# Altium PCB PCB1.PcbDoc (part 7 of 8)
Units mil, origin at the board's own origin, x right, y up, seen from the top; angles counter-clockwise.
Board outline 6000 x 4000 mil, 2 copper layers (Top Layer, Bottom Layer); 1253 components, 565 nets, 6549 pads, 0 vias.
Unrouted connection lines stored in the file: 1925.
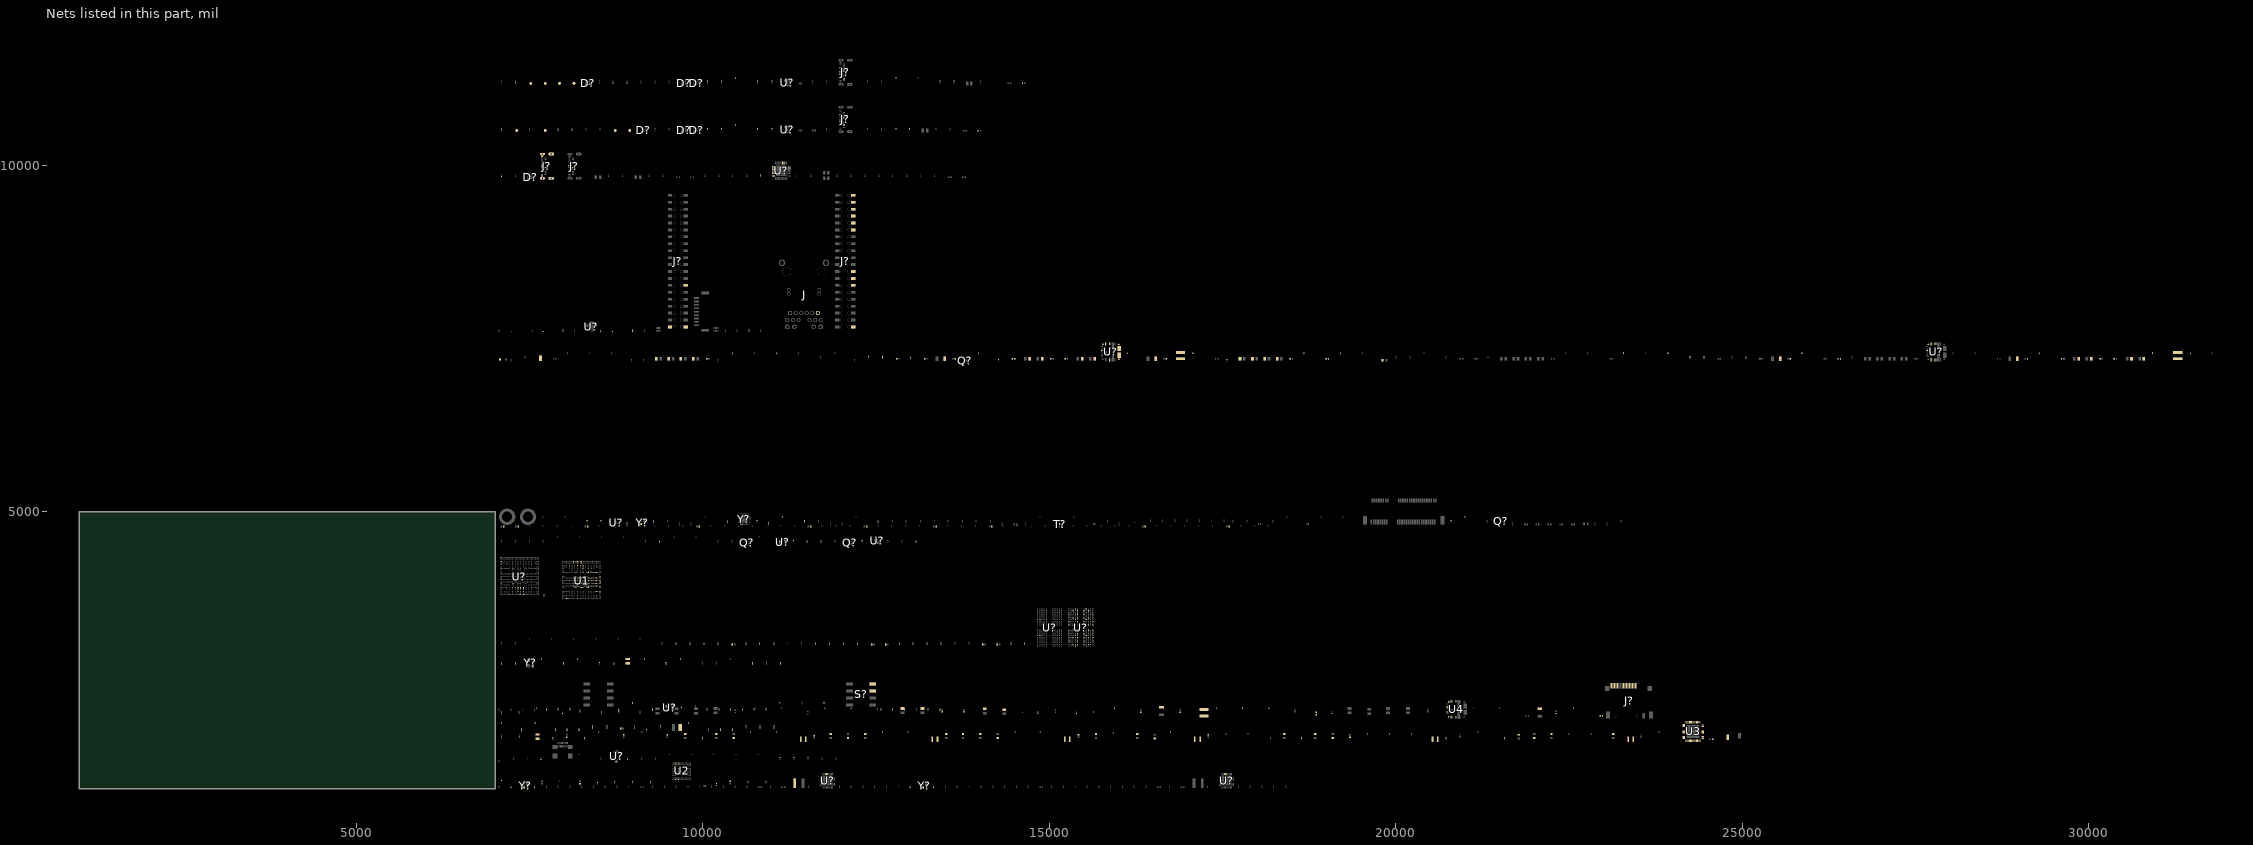
[diagram p5: the nets of this part, all layers, seen from the top]

## Nets (pads, with @x,y where several pads share a name; then routed paths per layer and width w, separated by ;. In a path a pad name is that pad's centre, name@x,y a point inside that pad or via, vN(x,y) a via of type N, cw(c..) or ccw(c..) an arc to the next point about the centre after c; other vN are vias at no path point) (continued)
mPCIe_W_DISABLE: PTP?.1@21000,4920 Q?.1@21516.14,4846.22 R?.2@20800,4871.42
NetC72_1: C72.1 PTP23.1 U3.2
NetC78_2: C78.2 PTP9.1 U3.1
NetC?_1: C?.1@8525,7598.58 L?.1@8985,7598.58 PTP?.1@8695,7600 U?.12@8449.06,7654.25 U?.14@8449.06,7685.75
NetC?_2: C?.2@10665,7621.42 J.6@11660,7865
NetCR?_2: 
NetF?_1: T?.1@7071.69,7195
NetJ?_1: J?.1@23463.58,2485.04 R?.2@10425,1861.42
NetJ?_2: J?.2@23420.28,2485.04 R?.1@10255,1838.58
NetJ?_3: J?.3@23376.97,2485.04 R?.1@10085,1838.58
NetJ?_5: J?.5@23290.35,2485.04 R?.1@8210,1838.58
NetJ?_7: J?.7@23203.74,2485.04 R?.1@8040,1838.58
NetJ?_8: J?.8@23160.43,2485.04 R?.1@7870,1838.58
NetJ?_SH1: J?.SH1@7678.56,9845.24 J?.SH2@7678.56,10124.76 J?.SH3@7811.44,9809.8 J?.SH4@7811.44,10160.2 J?.SH5@7685.45,9809.8 J?.SH6@7685.45,10160.2 L?.1@7090,9833.58
NetL1_1: L1.1 PTP3.1 U3.45 U3.46
NetL2_1: L2.1 PTP5.1 U3.36 U3.37
NetL3_1: L3.1 PTP10.1 U3.31 U3.32
NetL4_1: L4.1 PTP12.1 U3.19 U3.20
NetL5_1: L5.1 PTP14.1 U3.15
NetL6_1: L6.1 PTP16.1 U3.50 U3.51
NetL?_1: L?.1@11325.94,1075 U?.30@11896.46,1185.87
NetPTP8_1: PTP8.1 R5.1 R6.1 U3.38
NetPTP32_1: PTP32.1 R10.1 R13.1 U4.4
NetPTP36_1: PTP36.1 R14.2 R16.1 U4.8
NetPTP?_1: PTP?.1@8985,2240 R?.1@9275,2128.58 U?.5@9562.8,2170
NetQ?_3: Q?.3@13798.78,7180 R?.2@14265,7196.42
NetR3_1: R3.1 R4.1 U3.44
NetR17_2: R17.2 U4.11
NetR18_2: R18.2 U4.7
NetR?_1: R?.1@7665,1423.58 U1.AJ28
NetR?_2: R?.2@10835,9856.42 U?.25@11242.2,9959.37
NVCC_DRAM_1V1: C47.2 C48.2 C49.2 C50.2 C51.2 C52.2 C53.2 C54.2 C55.2 C92.1 C93.2 C?.1@9615,3088.58 C?.1@9815,3088.58 C?.1@10015,3088.58 C?.1@10220,3088.58 C?.1@10422.28,3080 C?.1@10620,3088.58 C?.1@10820,3088.58 C?.1@11025,3088.58 C?.1@11625,3088.58 C?.1@11830,3088.58 C?.1@12030,3088.58 C?.1@12230,3088.58 C?.1@12437.28,3080 C?.1@12637.28,3080 C?.1@12835,3088.58 C?.1@13035,3088.58 L6.2 PTP17.1 R?.1@13420,2128.58 U1.AA10 U3.52 U?.A4@15376.26,3593.7 U?.A9@15533.74,3593.7 U?.AA3@15344.76,3081.89 U?.AA5@15407.76,3081.89 U?.AA8@15502.24,3081.89 U?.AA10@15565.24,3081.89 U?.AB4@15376.26,3056.3 U?.AB9@15533.74,3056.3 U?.B3@15344.76,3568.11 U?.B5@15407.76,3568.11 U?.B8@15502.24,3568.11 U?.B10@15565.24,3568.11 U?.D1@15281.77,3516.93 U?.D5@15407.76,3516.93 U?.D8@15502.24,3516.93 U?.D12@15628.23,3516.93 U?.F3@15344.76,3465.75 U?.F5@15407.76,3465.75 U?.F8@15502.24,3465.75 U?.F10@15565.24,3465.75 U?.G2@14863.27,3440.16 U?.H1@15281.77,3414.57 U?.H5@15407.76,3414.57 U?.H8@15502.24,3414.57 U?.H12@15628.23,3414.57 U?.K1@15281.77,3363.39 U?.K3@15344.76,3363.39 U?.K10@15565.24,3363.39 U?.K12@15628.23,3363.39 U?.N1@15281.77,3286.61 U?.N3@15344.76,3286.61 U?.N10@15565.24,3286.61 U?.N12@15628.23,3286.61 U?.R1@15281.77,3235.43 U?.R5@15407.76,3235.43 U?.R8@15502.24,3235.43 U?.R12@15628.23,3235.43 U?.T2@14863.27,3209.84 U?.U3@15344.76,3184.25 U?.U5@15407.76,3184.25 U?.U8@15502.24,3184.25 U?.U10@15565.24,3184.25 U?.W1@15281.77,3133.07 U?.W5@15407.76,3133.07 U?.W8@15502.24,3133.07 U?.W12@15628.23,3133.07
NVCC_SD2: C11.2 C84.2 PTP11.1 R?.1@8615,1878.58 R?.1@10825,1878.58 R?.2@7380,1861.42 U1.W24 U3.55
NVCC_SNVS_1V8: C1.2 C68.1 C?.1@9690,2168.58 PTP22.1 R7.1 R?.1@10715,2798.58 R?.1@10915,2798.58 R?.1@11120,2798.58 R?.2@9275,2151.42 U1.R24 U3.3 U?.1@9487.2,2195.59
ONOFF: PTP?.1@11750,2240 R?.2@11120,2821.42 S?.8@12454.29,2510 U1.G22
PCIE_CLK_N: U1.E16
PCIE_CLK_P: U1.D16
PCIE_RESREF: R?.2@7710,3796.42 U1.F16
PCIE_RX_N: U1.B14
PCIE_RX_P: U1.A14
PCIE_TX_N: U1.B15
PCIE_TX_P: U1.A15
PER1_CC1: D?.4@9169.68,10488.58 J?.1@7725,10500 J?.A5@11988.56,10630.47
PER1_CC2: D?.5@9189.37,10488.58 J?.1@7315,10500 J?.B5@12037.78,10699.37
PER1_CH1_SET1: U?.1@11181.54,10533.62 U?.C1@12480.63,4575
PER1_CH1_SET2: U?.4@11181.54,10486.38 U?.C2@12500.32,4575
PER1_CH2_SET1: U?.13@11248.46,10533.62 U?.D1@12480.63,4555.31
PER1_CH2_SET2: U?.10@11248.46,10486.38 U?.E1@12480.63,4535.63
PER1_ID: R?.1@8110,10508.58 U?.B1@12480.63,4594.69
PER1_PWR_EN: R?.2@12380,10531.42 U?.A1@12480.63,4614.37
PER1_RX1_N: D?.2@9890.32,10488.58 J?.B10@12037.78,10581.26 U?.3@11181.54,10502.13
PER1_RX1_P: D?.1@9870.63,10488.58 J?.B11@12037.78,10561.57 U?.2@11181.54,10517.87
PER1_RX2_N: D?.2@9710.32,10488.58 J?.A10@11988.56,10728.9 U?.8@11230.75,10468.66
PER1_RX2_P: D?.1@9690.63,10488.58 J?.A11@11988.56,10748.58 U?.9@11246.5,10468.66
PER1_SEL: PTP?.1@10470,10580 R?.1@7910,10508.58 U?.16@11215,10551.34
PER1_TX1_N: C?.2@10790,10531.42 U?.7@11215,10468.66
PER1_TX1_P: C?.2@10995,10531.42 U?.6@11199.25,10468.66
PER1_TX2_N: C?.2@10070,10531.42 U?.11@11248.46,10502.13
PER1_TX2_P: C?.2@10270,10531.42 U?.12@11248.46,10517.87
PER2_CC1: D?.4@8364.68,11168.58 J?.1@7725,11180 J?.A5@11988.56,11310.47
PER2_CC2: D?.5@8384.37,11168.58 J?.1@7515,11180 J?.B5@12037.78,11379.37
PER2_CH1_SET1: U?.1@11181.54,11213.62 U?.E5@12559.37,4535.63
PER2_CH1_SET2: U?.4@11181.54,11166.38 U?.D4@12539.68,4555.31
PER2_CH2_SET1: U?.13@11248.46,11213.62 U?.D5@12559.37,4555.31
PER2_CH2_SET2: U?.10@11248.46,11166.38 U?.C5@12559.37,4575
PER2_ID: R?.1@8905,11188.58 U?.D3@12520,4555.31
PER2_PWR_EN: PTP?.1@12785,11260 R?.2@12380,11211.42 U?.E3@12520,4535.63
PER2_RX1_N: D?.2@9890.32,11168.58 J?.B10@12037.78,11261.26 U?.3@11181.54,11182.13
PER2_RX1_P: D?.1@9870.63,11168.58 J?.B11@12037.78,11241.57 U?.2@11181.54,11197.87
PER2_RX2_N: D?.2@9710.32,11168.58 J?.A10@11988.56,11408.9 U?.8@11230.75,11148.66
PER2_RX2_P: D?.1@9690.63,11168.58 J?.A11@11988.56,11428.58 U?.9@11246.5,11148.66
PER2_SEL: PTP?.1@10470,11260 R?.1@8705,11188.58 U?.16@11215,11231.34
PER2_TX1_N: C?.2@10790,11211.42 U?.7@11215,11148.66
PER2_TX1_P: C?.2@10995,11211.42 U?.6@11199.25,11148.66
PER2_TX2_N: C?.2@10070,11211.42 U?.11@11248.46,11182.13
PER2_TX2_P: C?.2@10270,11211.42 U?.12@11248.46,11197.87
PER_I2C_SCL: R?.1@11705,4558.58 U?.2@11112.6,4564.84
PER_I2C_SDA: R?.1@11505,4558.58 U?.3@11112.6,4545.16
PGOOD_3V3: PTP33.1 R11.1 U4.12
PGOOD_5V0: PTP31.1 R12.1 U4.1 U4.10
PGOOD_mPCIe: PTP?.1@11060,7285 R?.1@12595,7213.58 U?.1@15773.43,7411.73
PGOOD_RBC_1V8: PTP?.1@23290,7285 Q?.2@10615.39,4550 R?.1@24250,7213.58 U?.12@27726.26,7192.8 U?.D2@7094.09,4276.54
PGOOD_RBC_5V0: PTP?.1@23930,7285 R?.1@24450,7213.58 U?.1@27688.43,7411.73 U?.10@27675.08,7226.26
PMIC_32K_OUT: U3.7
PMIC_nINT: U1.D6 U3.13
PMIC_ON_REQ: R?.2@10715,2821.42 U1.F22 U3.39
PMIC_SCLH: U3.25
PMIC_SCLL: U3.27
PMIC_SDAH: U3.24
PMIC_SDAL: U3.26
PMIC_STBY_REQ: U1.J24 U3.40
POR_B: R?.2@10915,2821.42 U1.J29 U3.9 U?.3@9487.2,2144.41
POR_B_3V3: Q?.4@12154.61,4530.31 R?.2@12300,4581.42 U?.4@8722.52,1488.62 U?.4@9562.8,2144.41 U?.11@8747.13,1393.15
QSPIA_DATA0: U1.R25
QSPIA_DATA1: U1.L25
QSPIA_DATA2: U1.L24
QSPIA_DATA3: U1.N24
QSPIA_DQS: C?.2@10625,1901.42 R?.1@11030,1878.58 U1.R26
QSPIA_nSS0: R?.1@8410,1878.58 U1.L26
QSPIA_SCLK: U1.N25
RF1_OUT: C?.1@9328.5,7205 C?.1@9508.5,7205 C?.1@9683.5,7205 C?.1@9863.5,7205 C?.1@10054.25,7205 C?.1@12799.25,7205 C?.1@17753.5,7205 C?.1@17933.5,7205 C?.1@18108.5,7205 C?.1@18288.5,7205 C?.1@18479.25,7205 L?.1@19812.44,7185 PTP?.1@10425,7285 PTP?.1@19200,7285 R?.2@17565,7196.42 U?.3@15760.08,7364.06 U?.18@16002.64,7198.27 U?.19@16012.54,7255.79 U?.20@16012.54,7354.21 U?.21@16002.64,7411.73
SAI1_MCLK: U?.AE12@7290.94,3863.15
SAI1_RXC: U?.AH8@7212.2,3804.09
SAI1_RXFS: U?.AJ9@7231.89,3784.41
SAI1_TXD6: U?.AC12@7290.94,3902.52
SAI1_TXD7: U?.AJ13@7310.63,3784.41
SAI2_MCLK: U?.AJ15@7350,3784.41
SAI2_RXD: U?.AJ14@7330.31,3784.41
SAI2_TXC: U?.AH15@7350,3804.09
SAI2_TXD: U?.AH16@7369.69,3804.09
SAI2_TXFS: U?.AJ17@7389.37,3784.41
SAI3_MCLK: U?.AJ20@7448.43,3784.41
SAI3_RXC: U?.AJ18@7409.06,3784.41
SAI3_RXD: U?.AF18@7409.06,3843.46
SAI3_RXFS: U?.AJ19@7428.74,3784.41
SAI3_TXC: U?.AH19@7428.74,3804.09
SAI3_TXD: U?.AH18@7409.06,3804.09
SAI3_TXFS: U?.AC16@7369.69,3902.52
SAI5_MCLK: U?.AF14@7330.31,3843.46
SAI5_RXC: U?.AD14@7330.31,3882.83
SAI5_RXD0: U?.AE16@7369.69,3863.15
SAI5_RXD1: U?.AD16@7369.69,3882.83
SAI5_RXD2: U?.AF16@7369.69,3843.46
SAI5_RXD3: U?.AE14@7330.31,3863.15
SAI5_RXFS: U?.AC14@7330.31,3902.52
SD1_CLK: U1.W28
SD1_CMD: U1.W29
SD1_DATA0: U1.Y29
SD1_DATA1: U1.Y28
SD1_DATA2: U1.V29
SD1_DATA3: U1.V28
SD1_DATA4: U1.U26
SD1_DATA5: U1.AA29
SD1_DATA6: U1.AA28
SD1_DATA7: U1.U25
SD1_RESET_B: U1.W25
SD1_STROBE: U1.W26
SD2_CLK: R?.2@8210,1861.42 U1.AB29
SD2_CMD: R?.2@10085,1861.42 R?.2@10825,1901.42 U1.AB28
SD2_DATA0: R?.2@8040,1861.42 R?.2@8615,1901.42 U1.AC28
SD2_DATA1: R?.2@7870,1861.42 U1.AC29
SD2_DATA2: R?.1@10425,1838.58 U1.AA26
SD2_DATA3: R?.2@10255,1861.42 U1.AA25
SD2_nCD: J?.9@23117.13,2485.04 PTP?.1@7580,1950 U1.AD29
SD2_RESET_B: PTP?.1@7090,1950 R?.1@7380,1838.58 U1.AD28 U3.12
SD2_VSEL: U1.E6 U3.29
SD2_WP: U1.AC26
SD3_CLK: U1.U28 U2.M6
SD3_CMD: R2.1 U1.U29 U2.M5
SD3_DATA0: R1.1 U1.P29 U2.A3
SD3_DATA1: U1.N29 U2.A4
SD3_DATA2: U1.M29 U2.A5
SD3_DATA3: U1.R29 U2.B2
SD3_DATA4: U1.R28 U2.B3
SD3_DATA5: U1.P28 U2.B4
SD3_DATA6: U1.N28 U2.B5
SD3_DATA7: U1.M28 U2.B6
SD3_STROBE: PTP2.1 U1.T29 U2.H5
SE050_VOUT: C?.2@7980,7621.42 U?.15@8449.06,7701.5 U?.18@8390,7729.06
smps1_LDO: C?.1@12995,7213.58 PTP?.1@13975,7285 R?.2@12390,7236.42 R?.2@12595,7236.42 U?.5@15758.11,7324.69 U?.27@15811.26,7417.2
SPDIF_EXT_CLK: U?.AC18@7409.06,3902.52
SPDIF_RX: U?.AD18@7409.06,3882.83
SPDIF_TX: U?.AE18@7409.06,3863.15
SYS_nRST: PTP?.1@11110,2240 R7.2 S?.7@12454.29,2410 U3.8
SYS_STATUS: U1.T28
TPM_ENA: J?.2@9525.63,7665 PTP?.1@7695,7600 U?.11@8449.06,7638.5 U?.A1@7074.41,4335.59
UART1_RXD: J?.15@12169.37,8365 U1.AD6
UART1_TXD: J?.17@12169.37,8465 U1.AJ3
UART2_RXD: J?.29@12169.37,9065 U1.AF6
UART2_TXD: J?.31@12169.37,9165 U1.AH4
UART3_RXD: J?.33@12169.37,9265 U1.AE6
UART3_TXD: J?.35@12169.37,9365 U1.AJ4
UART4_RXD: J?.37@12169.37,9465 U1.AJ5
UART4_TXD: J?.39@12169.37,9565 U1.AH5
USB1_D_N: D?.2@9130.32,10488.58 J?.1@8735,10500 J?.A7@11988.56,10669.84 J?.B7@12037.78,10640.32 U1.E10
USB1_D_P: D?.1@9110.63,10488.58 J?.1@8945,10500 J?.A6@11988.56,10650.16 J?.B6@12037.78,10679.69 U1.D10
USB1_RX_N: U1.B9 U?.17@11199.25,10551.34
USB1_RX_P: U1.A9 U?.18@11183.5,10551.34
USB1_TX_N: U?.14@11246.5,10551.34
USB1_TX_P: U?.15@11230.75,10551.34
USB1_VBUS_3V3: U1.A11
USB2_D_N: D?.2@8325.32,11168.58 J?.1@7930,11180 J?.A7@11988.56,11349.84 J?.B7@12037.78,11320.32 U?.8@11017.8,9860.94
USB2_D_P: D?.1@8305.63,11168.58 J?.1@8140,11180 J?.A6@11988.56,11330.16 J?.B6@12037.78,11359.69 U?.9@11017.8,9841.26
USB2_HUB_UP_N: U1.E14 U?.30@11169.37,10032.2
USB2_HUB_UP_P: U1.D14 U?.31@11149.68,10032.2
USB2_RX_N: U1.B12 U?.17@11199.25,11231.34
USB2_RX_P: U1.A12 U?.18@11183.5,11231.34
USB2_TX_N: U?.14@11246.5,11231.34
USB2_TX_P: U?.15@11230.75,11231.34
USB2_VBUS_3V3: U1.D12
USB_hub2_N: D?.2@7495.31,9808.58 J?.A7@8073.56,9994.84 J?.B7@8122.78,9965.32 U?.3@11017.8,9959.37
USB_hub2_P: D?.1@7475.63,9808.58 J?.A6@8073.56,9975.16 J?.B6@8122.78,10004.69 U?.4@11017.8,9939.68
USB_hub3_N: D?.5@7554.37,9808.58 J?.A7@7678.56,9994.84 J?.B7@7727.78,9965.32 U?.6@11017.8,9900.32
USB_hub3_P: D?.4@7534.69,9808.58 J?.A6@7678.56,9975.16 J?.B6@7727.78,10004.69 U?.7@11017.8,9880.63
USB_mPCIe_N: T?.4@15148.19,4810.16 U?.1@11017.8,9998.74
USB_mPCIe_P: T?.1@15148.19,4829.84 U?.2@11017.8,9979.06
VBUS_5V_PER1: C?.1@7090,10508.58 C?.2@12785,10531.42 C?.2@12985,10531.42 R?.1@13972.28,10500
VBUS_5V_PER2: C?.1@7295,11188.58 C?.2@13425,11211.42 C?.2@13625,11211.42 R?.1@14612.28,11180
VBUS_RBC_FILT: C?.2@30621.5,7205 C?.2@30801.5,7205 L?.2@31290,7296.65 PTP?.1@30925,7285
VBUS_RF_FILT: C?.1@13204.25,7205 C?.2@15476.5,7205 C?.2@15656.5,7205 L?.1@14467.28,7205 L?.1@18997.28,7205 L?.2@16895,7296.65 PTP?.1@16125,7285
VBUS_SMPS: C?.1@15024.25,7205 C?.1@15229.25,7205 C?.1@30169.25,7205 C?.1@30374.25,7205 C?.2@14716.5,7205 C?.2@14896.5,7205 C?.2@29861.5,7205 C?.2@30041.5,7205 L?.1@16895,7203.35 L?.1@31290,7203.35 PTP?.1@17075,7285 PTP?.1@31470,7285
VBUS_SMPS_FILT: C?.1@25259.25,7205 L?.1@26387.28,7205 L?.1@29612.28,7205
VCC_LDO1: C115.1 PTP30.1 R11.2 R12.2 U4.5 U4.27
VCC_LDO3: C?.1@25055,7213.58 PTP?.1@25865,7285 R?.2@24250,7236.42 R?.2@24450,7236.42 U?.5@27673.11,7324.69 U?.27@27726.26,7417.2
VDD_1V8: C17.2 C60.1 C61.2 C62.2 C63.2 C64.2 C89.2 C90.1 C?.1@8817.28,1870 C?.1@9015,1878.58 C?.1@13235,3088.58 C?.1@13440,3088.58 C?.1@14042.28,3080 C?.1@14247.28,3080 C?.1@14445,3088.58 C?.1@14645,3088.58 C?.2@8905,4831.42 J?.13@9754.37,8265 J?.13@12169.37,8265 L5.2 L?.1@10355,4848.58 L?.1@11470,4848.58 L?.1@12530,4848.58 PTP15.1 R1.2 R2.2 R8.1 R?.1@8785,2128.58 R?.2@7740,2151.42 R?.2@7910,2151.42 R?.2@8080,2151.42 R?.2@8410,1901.42 R?.2@11030,1901.42 U1.AA16 U1.AA19 U1.AA24 U1.J16 U1.R22 U1.U22 U1.U24 U1.Y11 U2.C6 U2.M4 U2.N4 U2.P3 U2.P5 U3.14 U?.5@8750,4850.83 U?.F1@15281.77,3465.75 U?.F12@15628.23,3465.75 U?.G4@15376.26,3440.16 U?.G9@15533.74,3440.16 U?.T4@15376.26,3209.84 U?.T9@15533.74,3209.84 U?.U1@15281.77,3184.25 U?.U12@15628.23,3184.25
VDD_1V8_DIG: C?.2@10780,4871.42 C?.2@10950,4831.42 L?.2@11470,4871.42 PTP?.1@11150,4920 R?.2@8330,4871.42 Y?.7@10550.79,4816.18
VDD_3V3: C4.2 C5.2 C57.2 C58.2 C59.2 C85.1 C87.2 C88.2 C?.1@8915,1423.58 C?.2@9890,2191.42 C?.2@11305,4581.42 J?.1@9754.37,7665 J?.1@12169.37,7665 L4.2 L?.1@9375,4558.58 L?.1@13075,4558.58 L?.2@8985,7621.42 PTP13.1 R?.2@10060,2151.42 R?.2@10230,2151.42 R?.2@10400,2151.42 R?.2@10570,2151.42 R?.2@10740,2151.42 R?.2@10910,2151.42 R?.2@11115,1446.42 R?.2@11315,1446.42 R?.2@11520,1446.42 R?.2@12570,2151.42 R?.2@12740,2151.42 R?.2@12910,2151.42 R?.2@13080,2151.42 R?.2@13250,2151.42 R?.2@13420,2151.42 U1.AA11 U1.AA14 U1.J11 U1.J14 U1.K11 U1.Y10 U2.E6 U2.F5 U2.J10 U2.K9 U3.21 U3.22 U?.6@9562.8,2195.59 U?.8@11187.4,4584.53 U?.23@8762.87,1536.85
VDD_ARM: C6.2 C7.2 C8.2 C9.2 C10.2 C12.2 C13.2 C14.2 C15.2 C16.2 C70.1 C71.2 L1.2 PTP4.1 R3.2 R4.2 U1.T14 U1.T16 U1.U12 U1.U13 U1.U14 U1.U15 U1.U16 U1.U17 U1.V14 U1.V16 U1.W12 U1.W13 U1.W17 U1.Y14 U1.Y15 U1.Y16
VDD_MIPI_1P2_CAP: C56.2 U1.F20
VDD_SNVS_0V8: C2.2 U1.N26
VDD_SOC: C18.2 C19.2 C20.2 C21.2 C22.2 C23.2 C24.2 C25.2 C31.2 C32.2 C33.2 C34.2 C39.2 C40.2 C41.2 C42.2 C43.2 C44.2 C45.2 C46.2 C75.1 C77.2 C81.1 C82.2 L2.2 L3.2 PTP6.1 R5.2 R6.2 U1.K10 U1.K14 U1.K15 U1.K16 U1.L9 U1.L10 U1.L11 U1.L12 U1.L13 U1.L17 U1.L18 U1.L19 U1.L20 U1.L21 U1.M14 U1.M16 U1.N9 U1.N10 U1.N12 U1.N13 U1.N14 U1.N15 U1.N16 U1.N17 U1.N18 U1.N20 U1.N21 U1.P14 U1.P16 U1.R9 U1.R10 U1.R20 U1.R21 U1.U9 U1.U10 U1.U20 U1.U21 U1.W9 U1.W10 U1.W11 U1.W20 U1.W21 U1.W22
VDDA_1V8: C3.2 C26.2 C27.2 C28.2 C29.2 C30.2 C35.2 C36.2 C37.2 C38.2 C74.1 PTP7.1 U1.AA20 U1.AA22 U1.J19 U1.J20 U1.J22 U1.K19 U1.K20 U1.L22 U1.N22 U1.R6 U1.W18 U1.W19 U1.Y19 U1.Y20 U3.54
VIN1_5V0: C98.2 C99.1 L8.2 PTP24.1 U4.25
VIN1_5V0_RBC: C?.2@28975.12,7205 C?.2@29120.75,7205 L?.2@29647.72,7205 PTP?.1@29290,7285 U?.25@27785.31,7421.14
VIN1_smps1: C?.2@16535.12,7205 C?.2@16685.75,7205 L?.2@19032.72,7205 PTP?.1@18675,7285 U?.25@15870.32,7421.14
VIN2_3V3: C113.2 C114.1 L11.2 PTP29.1 U4.14
VIN2_3V3_RBC: C?.2@25550.12,7205 C?.2@25695.75,7205 L?.2@26422.72,7205 U?.14@27785.31,7188.86
VIN2_smps1: C?.2@13490.12,7205 C?.2@13640.75,7205 L?.2@14502.72,7205 U?.14@15870.32,7188.86
VIN_SMPS: C106.2 C107.2 C108.1 C109.1 J?.1@7655,7210 L10.1 PTP25.1
VIN_SMPS_FILT: C110.2 C111.2 C112.1 L8.1 L10.2 L11.1 PTP27.1 R15.2
VINT: C94.2 U3.4
VSD_3V3: C95.1 C?.2@9385,1901.42 C?.2@9675.2,1885 J?.4@23333.66,2485.04 PTP18.1 PTP?.1@9795,1950 T?.2@9185,1855.83 U3.23
VSYS_5V: C67.2 C69.2 C73.2 C76.2 C79.2 C80.2 C83.2 C86.2 C91.2 J1.1 L7.2 U3.16 U3.17 U3.18 U3.33 U3.34 U3.35 U3.47 U3.48 U3.49 U3.53 U3.56
WDOG_B: PTP19.1 R8.2 U1.B6 U3.28
X1_25: C?.1@9290,4848.58 Y?.1@9102.44,4818.35 Y?.1@10526.18,4939.22
X2: C?.2@8530,4871.42 Y?.2@10526.18,4919.53 Y?.3@9157.56,4861.65
XIN_32K: C96.1 QZ1.1 R9.1 U3.10
XOUT_32K: C97.1 QZ1.2 R9.2 U3.11
XTAL1_1: C?.1@7570,1013.58 C?.1@13330,1013.58 U?.36@11792.13,1211.46 U?.36@17552.13,1211.46 Y?.1@7412.44,1018.35 Y?.1@13172.44,1018.35
XTAL2_1: C?.1@7230,1013.58 C?.1@12990,1013.58 U?.37@11776.38,1211.46 U?.37@17536.38,1211.46 Y?.3@7467.56,1061.65 Y?.3@13227.56,1061.65
XTALI_24M: C?.1@7090,2798.58 PTP?.1@8190,2870 R?.1@7990,2798.58 U1.G25 Y?.1@7485.47,2854.37
XTALI_32K: C?.2@8510,2821.42 PTP?.1@9675,2870 QZ?.1@8915,2810.47 R?.1@9470,2798.58 U1.J25
XTALO_24M: C?.1@7295,2798.58 PTP?.1@7670,2870 R?.2@7990,2821.42 U1.G26 Y?.3@7544.53,2775.63
XTALO_32K: C?.1@8715,2798.58 PTP?.1@9155,2870 QZ?.2@8915,2869.53 R?.2@9470,2821.42 U1.J26

## Text inside footprints (layer, text, board x,y; h text height)
J?: Top 3D Body "Cutout Area" at 23465.55,2046.06 h7.87; Mechanical 1 "Cutout Area" at 23465.55,2046.06 h7.87
J?: Mechanical 2 "PCB EDGE" at 12169.17,11540.79 h16 r90
J?: Mechanical 2 "PCB EDGE" at 12169.17,10860.79 h16 r90
J?: Mechanical 2 "PCB EDGE" at 8254.17,10185.79 h16 r90
J?: Mechanical 2 "PCB EDGE" at 7859.17,10185.79 h16 r90
J?: Mechanical 2 "PCB EDGE" at 12169.17,11540.79 h16 r90
J?: Mechanical 2 "PCB EDGE" at 12169.17,10860.79 h16 r90
J?: Mechanical 2 "PCB EDGE" at 8254.17,10185.79 h16 r90
J?: Mechanical 2 "PCB EDGE" at 7859.17,10185.79 h16 r90
X?: Top Overlay "PCB edge" at 7933.66,1409.49 h19.68
X?: Top Overlay "PCB edge" at 7933.66,1409.49 h19.68